# Altium PCB UWB_Beacon_PCB.PcbDoc (part 1 of 2)
Units mm, origin at the board's own origin, x right, y up, seen from the top; angles counter-clockwise.
Board outline 99.75 x 83 mm, 2 copper layers (Top Layer, Bottom Layer); 63 components, 47 nets, 256 pads, 109 vias.
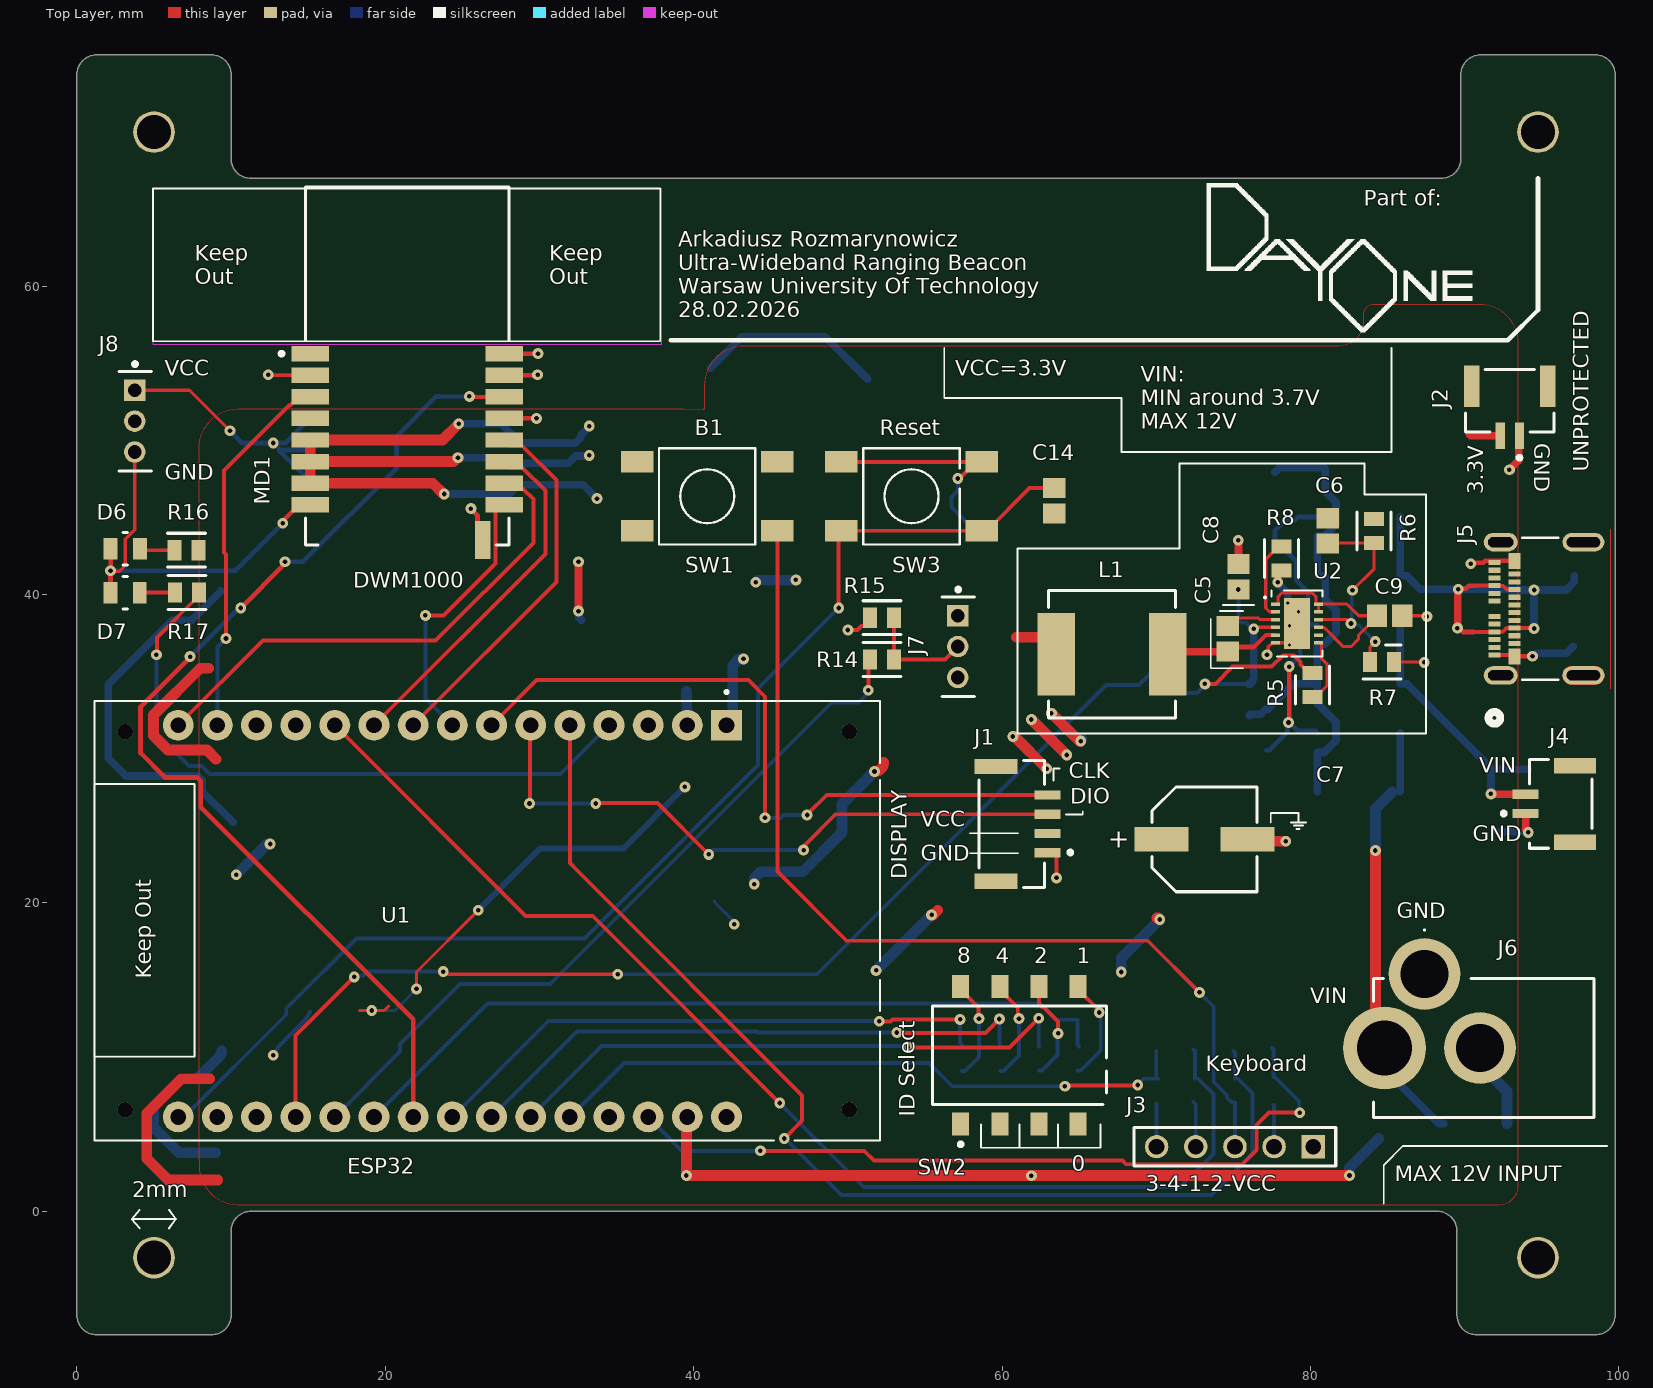
[diagram p0: Top Layer view]
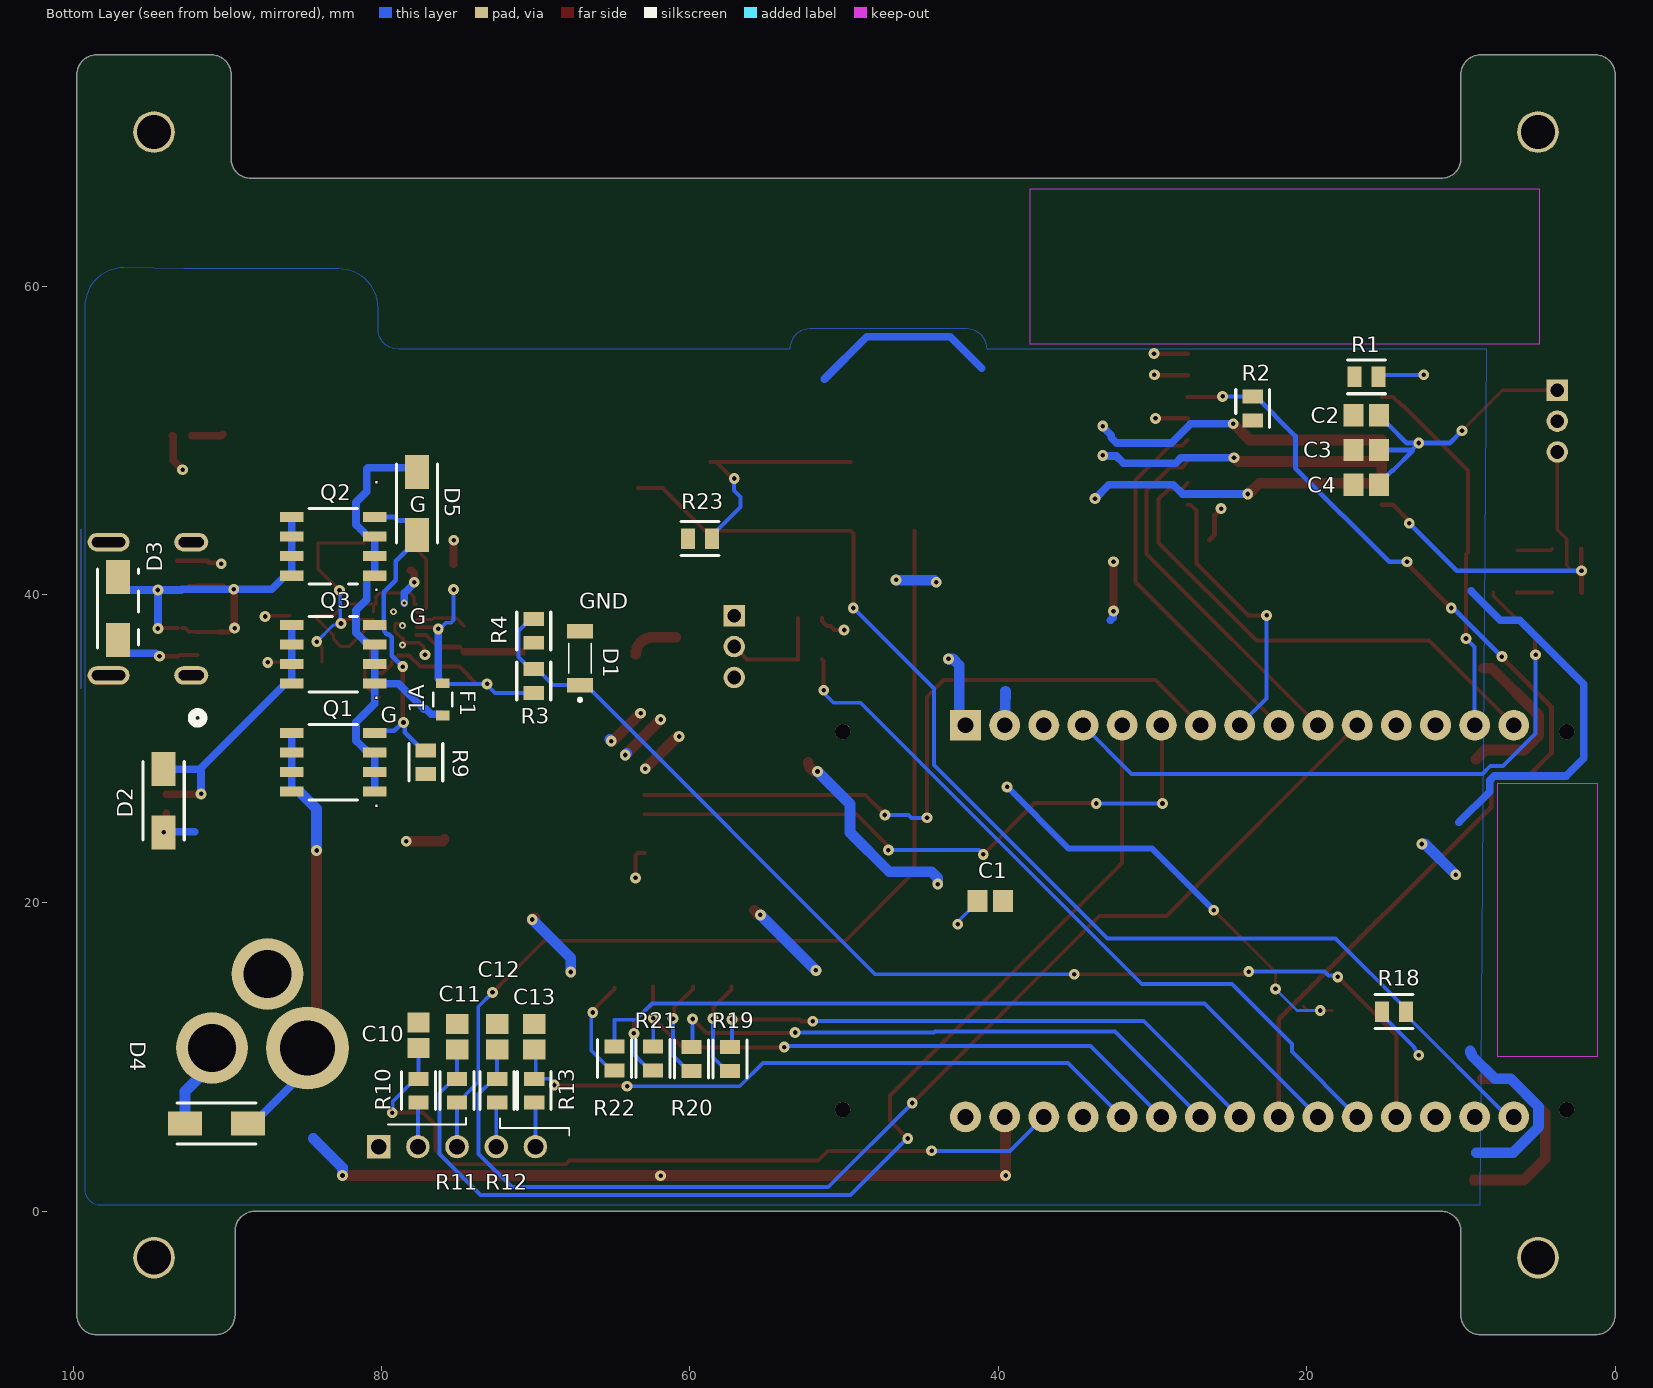
[diagram p1: Bottom Layer view, seen from below]
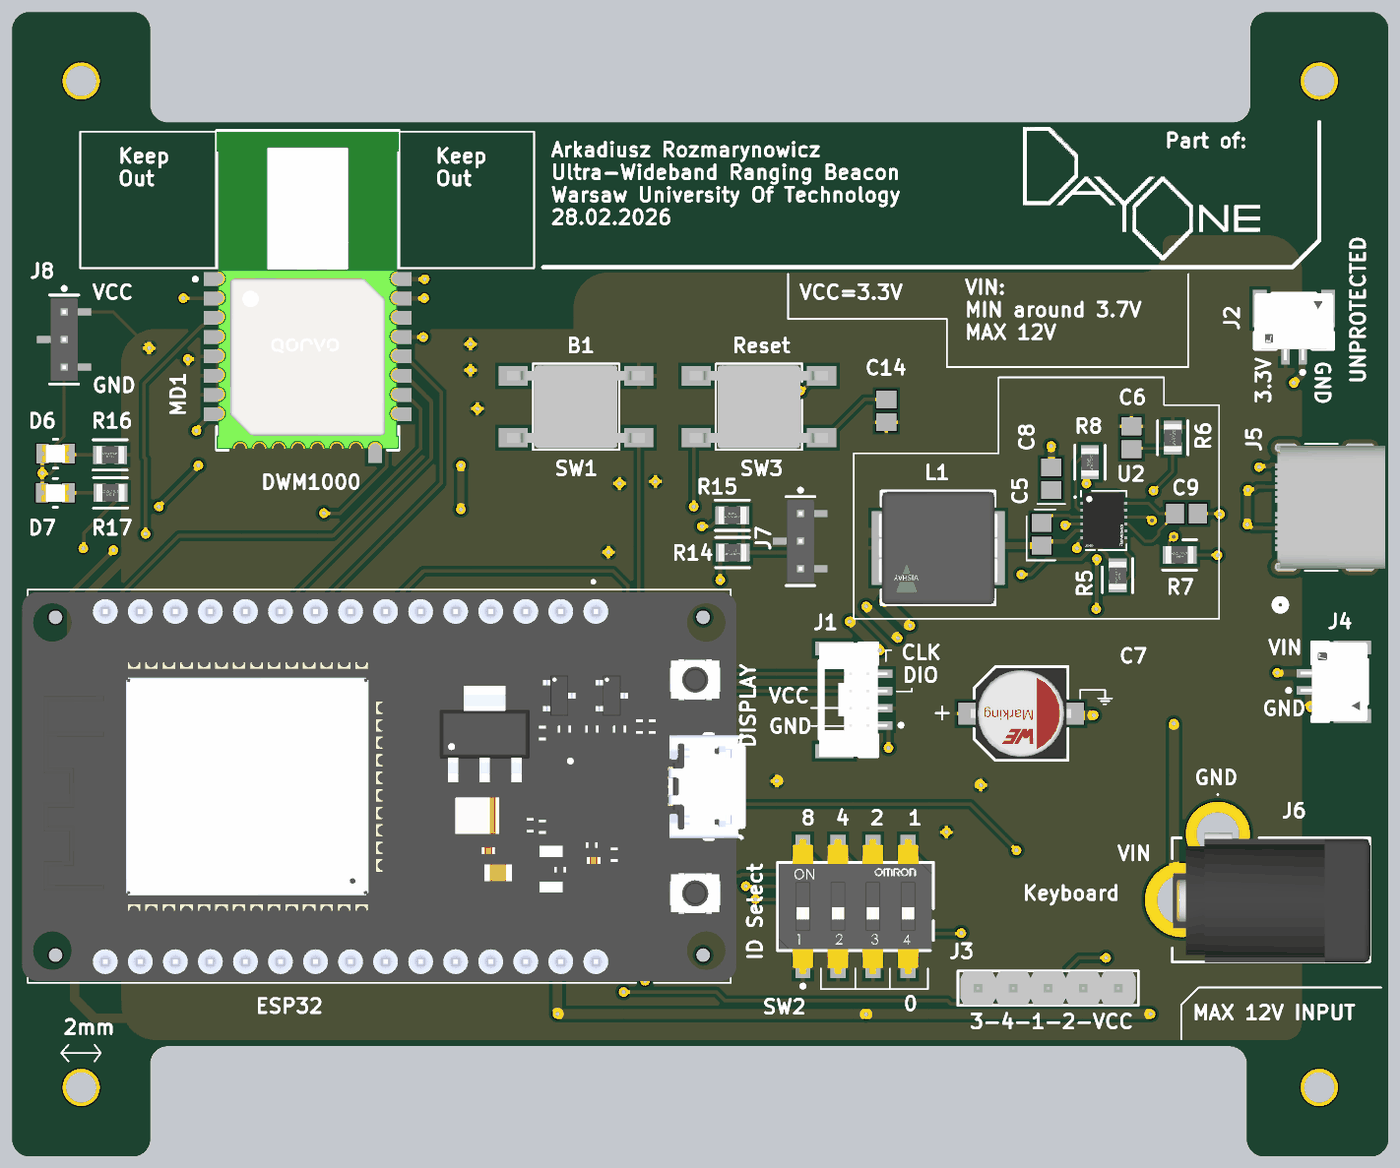
[diagram p2: 3D render of the assembled board from above, using the file's embedded part models]
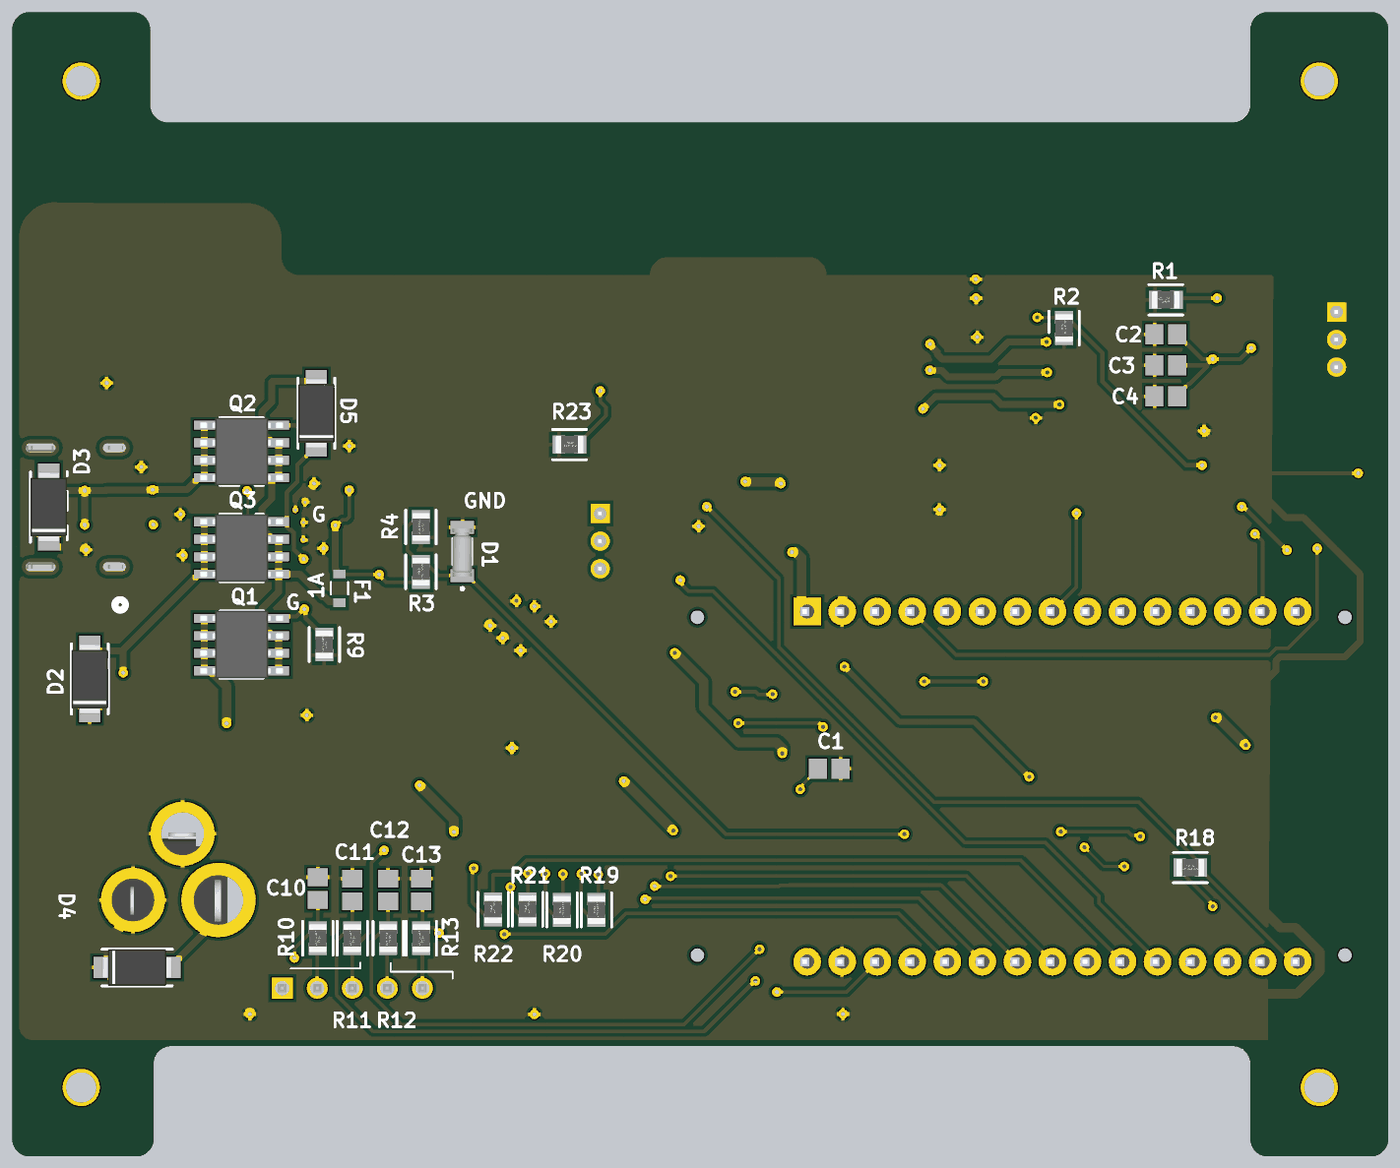
[diagram p3: 3D render of the assembled board from below, using the file's embedded part models]

## Layer stack, top to bottom
Top Solder: solder mask 0.0102, Solder Resist, Dk 3.5
Top Layer: signal copper 0.0356
Dielectric 1: dielectric 0.32, FR-4, Dk 4.8
Bottom Layer: signal copper 0.0356
Bottom Solder: solder mask 0.0102, Solder Resist, Dk 3.5

## Board outline
1.27,-8 8.73,-8 ccw(c8.73,-6.73) 10,-6.73 10,-1.27 cw(c11.27,-1.27) 11.27,0 88.23,0 cw(c88.23,-1.27) 89.5,-1.27 89.5,-6.73 ccw(c90.77,-6.73) 90.77,-8 98.485,-8 ccw(c98.485,-6.73) 99.755,-6.73 99.755,73.73 ccw(c98.485,73.73) 98.485,75 91.025,75 ccw(c91.025,73.73) 89.755,73.73 89.755,68.27 cw(c88.485,68.27) 88.485,67 11.27,67 cw(c11.27,68.27) 10,68.27 10,73.73 ccw(c8.73,73.73) 8.73,75 1.27,75 ccw(c1.27,73.73) 0,73.73 0,-6.73 ccw(c1.27,-6.73)

## Design rules (kind name [scope] priority, off if disabled: settings)
Clearance USB_Port_Pad_Clearance [(InPadClass('All Pads') AND InComponent('J5')) vs InNet('No Net')] p1: gap=0.254 ignorepadtopadclearanceinfootprint=FALSE except(0.14: Arc-Arc Arc-Track Arc-SMDPad Track-Track Track-SMDPad)
Clearance [All] p2: gap=0.254 ignorepadtopadclearanceinfootprint=TRUE except(0.1: SMDPad-Fill; 0.2: Arc-SMDPad Track-SMDPad SMDPad-SMDPad SMDPad-Text)
HoleSize [All] p1: absolutevalues=TRUE maxlimit=3.6 minlimit=0.025 maxpercent=80.000 minpercent=20.000
MinimumSolderMaskSliver [All] p1: minsoldermaskwidth=0.14
PolygonConnect [All] p1: connectstyle=Relief reliefconductorwidth=0.254 reliefentries=4 polygonreliefangle="90 Angle" airgapwidth=0.254
RoutingVias [All] p1: holewidth=0.3 width=0.7 viastyle="Through Hole" minholewidth=0.2 minwidth=0.45 maxholewidth=0.3 maxwidth=0.7
SilkToSolderMaskClearance [IsPad] p1: minsilkscreentomaskgap=0.2 clearancetoexposedcopper=TRUE
SolderMaskExpansion [All] p1: expansion=0.102 istentingtop=FALSE
SupplyNets "Schematic Supply Nets_1" [InNet('VCC')] p1: voltage=0.000
SupplyNets "Schematic Supply Nets" [InNet('GND')] p2: voltage=0.000
Width [All] p1: maxlimit=0.7 minlimit=0.2 preferedwidth=0.254 minimp=50.000000 maximp=50.000000 favimp=50.000000
27 further rules are at their usual default settings.

## Classes and differential pairs
component class Connectors: J1 J2 J3 J4 J5 J6
component class Microcontrollers: C1 C2 C3 C4 MD1 R1 R2 U1
component class Power: C5 C6 C7 C8 C9 D1 D2 D3 D4 D5 F1 L1 Q1 Q2 Q3 R3 R4 R5 R6 R7 R8 R9 U2
component class Interface: C10 C11 C12 C13 C14 D6 D7 J7 J8 R10 R11 R12 R13 R14 R15 R16 R17 R18 R19 R20 R21 R22 R23 REset SW1 SW2 SW3

## Components (designator, comment, footprint, x,y, rotation, side; value= is the part's Value field where it differs from the comment)
C1 "100nF ESP" CAPC2013X145X48NL20T23 40.527,20.127 r0 bottom
C2 "100nF DWM" CAPC2013X145X48NL20T23 16.127,51.627 r180 bottom
C3 "100nF DWM" CAPC2013X145X48NL20T23 16.127,49.377 r180 bottom
C4 "100nF DWM" CAPC2013X145X48NL20T23 16.127,47.127 r180 bottom
C5 "100nF" CAPC2013X145X48NL20T23 74.627,37.127 r90 top
C6 "27pF" CAPC2013X145X48NL20T23 81.127,44.127 r90 top
C7 "100uF" WCAP-ASLI_D6.3H7.7 73.127,24.127 r180 top
C8 "4.7uF" CAPC2013X145X48NL20T23 75.327,41.152 r270 top
C9 "1uF" CAPC2013X145X48NL20T23 85.127,38.627 r180 top
C10 "100nF" CAPC2013X145X48NL20T23 77.6,11.425 r270 bottom
C11 "100nF" CAPC2013X145X48NL20T23 75.1,11.325 r270 bottom
C12 "100nF" CAPC2013X145X48NL20T23 72.5,11.325 r270 bottom
C13 "100nF" CAPC2013X145X48NL20T23 70.1,11.325 r270 bottom
C14 "100nF" CAPC2013X145X48NL20T23 63.377,46.077 r270 top
D1 "Zener 3.3V" ZMM33B 67.127,35.877 r90 bottom
D2 "BATTERY_TVS" DIONM5127X250N 94.127,26.627 r90 bottom
D3 "USB_TVS" DIONM5127X250N 97.1,39.1 r90 bottom
D4 "DC12V_TVS" DIONM5127X250N 90.7,5.7 r180 bottom
D5 "SOURCE_GATE_TVS" DIONM5127X250N 77.702,45.902 r90 bottom
D6 "Power_Indicator" LEDC2012X40N 3.138,42.971 r0 top
D7 "Status_LED" LEDC2012X40N 3.127,40.127 r0 top
F1 "1A PPTC" "CHIP_ 0603L_1P8X1_LTF" 76.027,33.209 r270 bottom
J1 "Display_Connector" FP-BM04B-GHS-TBT_LF_SN-MFG 60.627,25.127 r270 top
J2 "Unprotected_Power" FP-SM02B-GHS-TB_LF_SN-MFG 92.925,52.575 r180 top
J3 "Goldpin male header" SMTC-MTLW-105-05-X-S-190 80.18,4.2 r180 top
J4 "Battery_Connector" FP-SM02B-GHS-TB_LF_SN-MFG 96.227,26.427 r90 top
J5 "USB C" CONN_1054500101_MOL 95.739,39.08 r90 top
J6 "DC_Connector" PCGK21 87.4,15.4 r180 top
J7 "Mode Select" FP-TMM-103-03-T-S-MFG 57.147,36.627 r270 top
J8 "External Voltage Measurement" FP-TMM-103-03-T-S-MFG 3.77,51.25 r270 top
L1 "22uH 8282" FP-IHLP-3232DZ-FP_2_413x5-MFG 67.127,36.127 r180 top
MD1 "DWM1000" FP-DWM1000-MFG 21.422,54.827 r0 top
Q1 "DC12V_Protection" SOIC127P600X170-8N 83.127,29.127 r0 bottom
Q2 "USB_Protection" SOIC127P600X170-8N 83.127,43.127 r0 bottom
Q3 "Battery_Protection" SOIC127P600X170-8N 83.127,36.127 r0 bottom
R1 "10k" FP-CRGCQ0805-IPC_C 16.127,54.127 r0 bottom
R2 "10k" FP-CRGCQ0805-IPC_C 23.502,52.076 r90 bottom
R3 "270k" FP-CRGCQ0805-IPC_C 70.127,34.403 r90 bottom value=100ohm
R4 "100k" FP-CRGCQ0805-IPC_C 70.127,37.653 r270 bottom value=100ohm
R5 "100k" FP-CRGCQ0805-IPC_C 80.127,34.127 r270 top value=100KΩ
R6 "100k" FP-CRGCQ0805-IPC_C 84.127,44.127 r90 top value=100KΩ
R7 "22.1k" FP-CRGCQ0805-IPC_C 84.627,35.627 r180 top
R8 "100k" FP-CRGCQ0805-IPC_C 78.127,42.351 r90 top value=100KΩ
R9 "120ohm" FP-CRGCQ0805-IPC_C 77.127,29.127 r270 bottom value=100ohm
R10 "220ohm" FP-CRGCQ0805-IPC_C 77.6,7.824 r270 bottom
R11 "220ohm" FP-CRGCQ0805-IPC_C 75.1,7.824 r270 bottom
R12 "220ohm" FP-CRGCQ0805-IPC_C 72.5,7.824 r270 bottom
R13 "220ohm" FP-CRGCQ0805-IPC_C 70.1,7.824 r270 bottom
R14 "220ohm" FP-CRGCQ0805-IPC_C 52.224,35.8 r0 top
R15 "10k" FP-CRGCQ0805-IPC_C 52.2,38.5 r0 top
R16 "120ohm" FP-CRGCQ0805-IPC_C 7.101,42.877 r180 top value=120
R17 "120ohm" FP-CRGCQ0805-IPC_C 7.127,40.127 r180 top value=120
R18 "10k" FP-CRGCQ0805-IPC_C 14.351,12.952 r180 bottom
R19 "220ohm" FP-CRGCQ0805-IPC_C 57.4,9.876 r90 bottom
R20 "220ohm" FP-CRGCQ0805-IPC_C 59.9,9.876 r90 bottom
R21 "220ohm" FP-CRGCQ0805-IPC_C 62.4,9.924 r90 bottom
R22 "220ohm" FP-CRGCQ0805-IPC_C 64.9,9.924 r90 bottom
R23 "220ohm" FP-CRGCQ0805-IPC_C 59.351,43.627 r180 bottom
SW1 "Keyboard_B1_Switch" SW4_FSM-5P23_TEC 40.877,46.377 r180 top
SW2 "Beacon_ID_Switch" FP-A6S-4104-H-MFG 61.127,10.127 r90 top
SW3 "RESET" SW4_FSM-5P23_TEC 54.127,46.377 r180 top
U1 "ESP32-DEVKIT-V1" MODULE_ESP32_DEVKIT_V1 26.612,18.827 r270 top
U2 "ISL85410FRZ-T" L12_4x3_MFG 79.127,38.127 r0 top

## Footprints (in the part's own frame and the unit in brackets; to place one, negate y for a bottom-side part, rotate by r counter-clockwise, add the part's x,y. Pads: shape width x height; smd on the part's side, far side on the other; paste and mask are expansions set on the pad)
CAPC2013X145X48NL20T23 [mm] "Chip Capacitor, 2-Leads, Body 2.00x1.25mm, IPC Medium Density"
  rect 1.3x1.45 smd: 1(-0.825,0) 2(0.825,0)
  body extent -1.1,-0.72 1.1,0.72, height 1.45
"CHIP_ 0603L_1P8X1_LTF" [mm]
  rect 0.631x0.898 smd paste+0 mask+0: 1(-1.043,0) 2(1.043,0)
  silkscreen extent -0.44,-0.62 0.44,0.62
CONN_1054500101_MOL [mil]
  rect 13x30 smd paste+0 mask+0: A1(-118.11,149.96) A2(-98.43,149.96) A3(-78.74,149.96) A4(-59.06,149.96) A5(-39.37,149.96) A6(-19.68,149.96) A7(19.68,149.96) A8(39.37,149.96) A9(59.06,149.96) A10(78.74,149.96) A11(98.43,149.96) A12(118.11,149.96) B2(88.58,98.78) B3(68.9,98.78) B4(49.21,98.78) B5(29.53,98.78) B6(9.84,98.78) B7(-9.84,98.78) B8(-29.53,98.78) B9(-49.21,98.78) B10(-68.9,98.78) B11(-88.58,98.78)
  rect 41x30 smd paste+0 mask+0: B1(122.05,98.78) B12(-122.05,98.78)
  oval 47x87 hole 26 slot 65 at 90 deg paste-99999 mask-43.5: S1(-170.08,133.81) S4(170.08,133.81)
  oval 47x107 hole 26 slot 85 at 90 deg paste-99999 mask-53.5: S2(-170.08,-77.21) S3(170.08,-77.21)
  Top Layer region: -193.13,-42.62 -193.58,-47.21 -193.58,-107.21 -193.13,-111.79 -191.79,-116.2 -189.62,-120.26 -186.7,-123.83 -183.13,-126.75 -179.07,-128.92 -174.66,-130.26 -170.08,-130.71 -165.49,-130.26 -161.09,-128.92 -157.02,-126.75 -153.46,-123.83 -150.54,-120.26 -148.37,-116.2 -147.03,-111.79 -146.58,-107.21 -146.58,-47.21 -147.03,-42.62 -148.37,-38.22 -150.54,-34.15 -153.46,-30.59 -157.02,-27.67 -161.09,-25.5 -165.49,-24.16 -170.08,-23.71 -174.66,-24.16 -179.07,-25.5 -183.13,-27.67 -186.7,-30.59 -189.62,-34.15 -191.79,-38.22
  Multi-Layer lines w1: -203.58,-146.67 203.58,-146.67
  silkscreen extent -294,-13 181,165, body extent -176,-150 176,161, height 126
DIONM5127X250N [mm]
  rect 2.2x1.55 smd: 1(-2.05,0) 2(2.05,0)
  silkscreen extent -2.55,-1.33 2.55,1.33, body extent -2.55,-1.33 2.55,1.33, height 2.25
FP-A6S-4104-H-MFG [mm]
  rect 1.5x1.1 smd paste+0 mask+0: 1(-4.45,3.81) 2(-4.45,1.27) 3(-4.45,-1.27) 4(-4.45,-3.81) 5(4.45,-3.81) 6(4.45,-1.27) 7(4.45,1.27) 8(4.45,3.81)
  silkscreen extent -5.9,-5.65 3.2,5.65, body extent -5.3,-5.75 5.3,5.75, height 0.25
FP-BM04B-GHS-TBT_LF_SN-MFG [mm]
  rect 0.6x1.7 smd paste+0 mask+0: 1(1.875,2.325) 2(0.625,2.325) 3(-0.625,2.325) 4(-1.875,2.325)
  rect 1x2.8 smd paste+0 mask+0: 5(-3.725,-1.025) 6(3.725,-1.025)
  silkscreen extent -4.13,-2.12 4.13,3.93, body extent -4.33,-2.52 4.33,3.27, height 0.25
FP-CRGCQ0805-IPC_C [mm]
  rect 0.906x1.31 smd paste+0 mask+0: 1(-0.776,0) 2(0.776,0)
  silkscreen extent -1.23,-1.1 1.23,1.1, body extent -1,-0.63 1,0.63, height 0.65
FP-DWM1000-MFG [mm]
  rect 2.45x1 smd paste+0 mask+0: 1(-6.295,0.8) 2(-6.295,-0.6) 3(-6.295,-2) 4(-6.295,-3.4) 5(-6.295,-4.8) 6(-6.295,-6.2) 7(-6.295,-7.6) 8(-6.295,-9) 17(6.295,-9) 18(6.295,-7.6) 19(6.295,-6.2) 20(6.295,-4.8) 21(6.295,-3.4) 22(6.295,-2) 23(6.295,-0.6) 24(6.295,0.8)
  rect 1x2.45 smd paste+0 mask+0: 16(4.9,-11.295)
  Keep-Out Layer region: -16.5,1.42 16.5,1.42 16.5,11.495 -16.5,11.495
  Keep-Out Layer region: -16.5,1.42 16.5,1.42 16.5,11.495 -16.5,11.495
  silkscreen extent -8.27,-11.6 6.6,11.6, body extent -7.62,-12.62 7.62,11.7, height 0.25
FP-IHLP-3232DZ-FP_2_413x5-MFG [mil]
  rect 95x210 smd paste+0 mask+0: 1(-142.5,0) 2(142.5,0)
  silkscreen extent -163,-163 163,163, body extent -194,-166 194,166, height 10
FP-SM02B-GHS-TB_LF_SN-MFG [mm]
  rect 0.6x1.7 smd paste+0 mask+0: 1(-0.625,2.275) 2(0.625,2.275)
  rect 1x2.7 smd paste+0 mask+0: 3(-2.475,-0.925) 4(2.475,-0.925)
  silkscreen extent -2.88,-2.02 2.88,3.82, body extent -3.08,-2.37 3.08,3.22, height 0.25
FP-TMM-103-03-T-S-MFG [mm]
  rect 1.39x1.39 hole 0.89 paste-2539.97 mask+0: 1(-2,-0.02)
  round 1.39 hole 0.89 paste-2539.97 mask+0: 2(0,-0.02) 3(2,-0.02)
  silkscreen extent -3.82,-1.05 3.22,1.05, body extent -3.1,-2.07 3.1,2.07, height 0.25
L12_4x3_MFG [mm] "Recommended Land Pattern"
  rect 0.6x0.23 smd paste+0 mask+0: 1(-1.4,1.25) 2(-1.4,0.75) 3(-1.4,0.25) 4(-1.4,-0.25) 5(-1.4,-0.75) 6(-1.4,-1.25) 7(1.4,-1.25) 8(1.4,-0.75) 9(1.4,-0.25) 10(1.4,0.25) 11(1.4,0.75) 12(1.4,1.25)
  rect 1.7x3.3 smd paste+0 mask+0: 13(0,0)
  silkscreen extent -2.14,-2.15 1.65,2.15, body extent -1.5,-2 1.5,2, height 1
LEDC2012X40N [mm]
  rect 0.9x1.4 smd: 1(-0.95,0) 2(0.95,0)
  silkscreen extent -0.15,-1.05 0.15,1.05, body extent -1,-0.65 1,0.65, height 0.8
MODULE_ESP32_DEVKIT_V1 [mm]
  rect 2x2 / inner round 2 / far side rect 2x2 hole 1.02: 1(-12.7,15.515)
  round 2 hole 1.02: 2(-12.7,12.975) 3(-12.7,10.435) 4(-12.7,7.895) 5(-12.7,5.355) 6(-12.7,2.815) 7(-12.7,0.275) 8(-12.7,-2.265) 9(-12.7,-4.805) 10(-12.7,-7.345) 11(-12.7,-9.885) 12(-12.7,-12.425) 13(-12.7,-14.965) 14(-12.7,-17.505) 15(-12.7,-20.045) 16(12.7,-20.045) 17(12.7,-17.505) 18(12.7,-14.965) 19(12.7,-12.425) 20(12.7,-9.885) 21(12.7,-7.345) 22(12.7,-4.805) 23(12.7,-2.265) 24(12.7,0.275) 25(12.7,2.815) 26(12.7,5.355) 27(12.7,7.895) 28(12.7,10.435) 29(12.7,12.975) 30(12.7,15.515)
  round 1 hole 1 unplated: ""(-12.28,23.475) ""(-12.28,-23.475) ""(12.23,23.475) ""(12.23,-23.475)
  Keep-Out Layer region: 8.78,-25.475 -8.91,-25.475 -8.91,-18.985 8.78,-18.985
  Keep-Out Layer region: 8.78,-25.475 -8.91,-25.475 -8.91,-18.985 8.78,-18.985
  silkscreen extent -14.95,-25.48 14.23,25.48, body extent -14.1,-25.9 14.1,26.55, height 7.05
PCGK21 [mm]
  round 4.65 hole 3.1: 2(0,0) 3(-3.6,4.8)
  round 5.385 hole 3.59: 4(2.6,4.8)
  silkscreen extent -11,-2.9 3.3,9.3, body extent -11.05,-0.07 3.25,9.35, height 11.1
SMTC-MTLW-105-05-X-S-190 [mm] "Terminal Assembly, 1x5 Pins, Vertical, 2.54mm Pitch, Male"
  rect 1.52x1.52 hole 1.02: 1(0,0)
  round 1.52 hole 1.02: 2(2.54,0) 3(5.08,0) 4(7.62,0) 5(10.16,0)
  silkscreen extent -1.46,-1.24 11.62,1.24, body extent -1.27,-1.24 11.43,1.24, height 6.35
SOIC127P600X170-8N [mm]
  rect 1.525x0.65 smd: 1(-2.688,1.905) 2(-2.688,0.635) 3(-2.688,-0.635) 4(-2.688,-1.905) 5(2.688,-1.905) 6(2.688,-0.635) 7(2.688,0.635) 8(2.688,1.905)
  silkscreen extent -1.57,-2.45 1.57,2.45, body extent -3,-2.45 3,2.45, height 1.7
SW4_FSM-5P23_TEC [mil]
  rect 83x55 smd paste+0 mask+0: 1(-179,88) 2(179,88) 3(-179,-88) 4(179,-88)
  silkscreen extent -123,-123 123,123, body extent -197,-118 197,118, height 199
WCAP-ASLI_D6.3H7.7 [mm] "Aluminium Electrolytic V-Chip SMT Capacitors, 6.3x7.7mm"
  rect 3.5x1.6 smd: 1(2.8,0) 2(-2.8,0)
  silkscreen extent -3.4,-3.4 3.4,3.4, body extent -3.65,-3.3 3.65,3.3, height 7.7
ZMM33B [mm]
  rect 0.95x1.7 smd: 1(-1.75,0) 2(1.75,0)
  silkscreen extent -2.8,-0.72 0.97,0.72, body extent -1.81,-0.72 1.69,0.72, height 1.49

## Part data
C1 C2 C3 C4 C5 C6 C8 C9 C10 C11 C12 C13 C14: library part CMP-2007-01705-1, Manufacturer=Vitramon, Part Number=VJ0805Y104KXAMR
C7: library part CMP-03913-54202496-2, "Cap Aluminum Lytic 100uF 35V 20% (6.3 X 7.7mm) SMD 300mA 2000h 105C T/R", Capacitance=100µF, Case/Package=Radial, ESR (Equivalent Series Resistance)=321.392mΩ, Insulation Resistance=1MΩ, Leakage Current=35µA, Max Operating Temperature=105°C, Min Operating Temperature=-55°C, Ripple Current=300mA, Tolerance=20%, Voltage Rating=35V, Diameter=6.3mm, Dissipation Factor=14%, Height=7.7mm, Impedance=380mΩ, Length=7.7mm, Life (Hours)=2000hours, Packaging="Cut Tape", REACH SVHC=Unknown, Ripple Current (AC)=300mA, RoHS=Compliant, Voltage Rating (DC)=35V, Width=6.6mm
D1: library part ZMM33B, "SMD Planra Zener Diode", Manufacturer_Name=Diotec, Mouser Part Number=637-ZMM33B, Arrow Part Number=ZMM33B, Arrow Price/Stock=https://www.arrow.com/en/products/zmm33b/diotec-semiconductor-ag?utm_currency=USD&region=nac, Geometry.Height=1.45mm, Manufacturer_Part_Number=ZMM33B, Mouser Price/Stock=https://www.mouser.co.uk/ProductDetail/Diotec-Semiconductor/ZMM33B?qs=OlC7AqGiEDlS5hTI7j6ASg%3D%3D
D2 D3 D4 D5: library part SMAJ12CA-HP6AT_13, "19.9V Clamp 30.2A Ipp Tvs Diode Surface Mount DO-214AC (SMA)", Manufacturer_Name=YAGEO, Manufacturer_Part_Number=SMAJ12CA-HP6AT/13, Datasheet Link=https://www.yageo.com/upload/media/product/productsearch/datasheet/cpc/tvs/SMAJ-HP6AT_1.pdf, Geometry.Height=2.5mm
D6 D7: library part LS_R976, "Red 0805 CHIPLED LS R976N-R102 Osram Opto LS R976, CHIPLED 0805 Series Red LED, 633 nm, 2012 (0805), Rectangle Lens SMD Package", Arrow Part Number="LS R976", Manufacturer_Name="ams OSRAM", Mouser Part Number=720-LSR976D5178, Arrow Price/Stock=https://www.arrow.com/en/products/lsr976/osram-opto-semiconductors?region=europe, Datasheet Link=http://uk.rs-online.com/web/p/products/4974804, Geometry.Height=0.4mm, Manufacturer_Part_Number="LS R976", Mouser Price/Stock=https://www.mouser.co.uk/ProductDetail/OSRAM-Opto-Semiconductors/LS-R976?qs=OIr7YF%252B2cWVTfzKl425Fkw%3D%3D
F1: library part 0603L100SLYR, "PPTC", Manufacturer_Name="Littelfuse Inc", Copyright="Copyright (C) 2025 Ultra Librarian. All rights reserved.", Manufacturer_Part_Number=0603L100SLYR, RefDes=RefDes, Type=Type
J1: library part CMP-17439-000062-2, "CONN HEADER SMD 4POS 1.25MM", Case/Package=SMD/SMT, Current Rating=1A, Housing Color=Natural, Max Operating Temperature=85°C, Min Operating Temperature=-25°C, Voltage Rating=50V, Contact Material=Bronze, Contact Plating=Tin, Gender=Male, Housing Material=Nylon, Lead Free="Lead Free", Number of Contacts=4, Number of Positions=4, Number of Rows=4, Orientation=Straight, Packaging="Cut Tape", Pitch=1.25mm, REACH SVHC="No SVHC", Series=GH, Termination=Crimp, Voltage Rating (AC)=50V, Wire/Cable Gauge=26AWG
J2 J4: library part CMP-2000-07076-2, "CONN HEADER SMD R/A 2POS 1.25MM", Color=Natural, Current Rating=1A, Package Quantity=2500, Voltage Rating=50V, Connector Type="Outer Shroud Contact", Contact Material=Bronze, Contact Plating=Tin, Contact Type="Male Pin", Fastening Type=Latch, Housing Color=Natural, Housing Material=Nylon, Lead Free="Lead Free", Mount="Surface Mount", Number of Contacts=2, Number of Positions=2, Number of Rows=1, Orientation="Right Angle", Packaging="Tape and Reel", Pitch=0.049inch, Series=GH, Termination=Solder
J3: library part CMP-1024-00077-1, "Low Profile .025\" SQ Post Header, Through-hole, Vertical, -55 to 105 degC, 2.54 mm Pitch, 5-Pin, Male, RoHS", Manufacturer=Samtec, PartNumber=MTLW-105-05-T-S-190, Temperature Range="-55 to 105 degC", ComponentLink1Description="Manufacturer URL", ComponentLink1URL=http://www.samtec.com, ComponentLink2Description=Datasheet, ComponentLink2URL=http://www.samtec.com/documents/webfiles/pdf/MTLW_TH.PDF, ComponentLink3Description="Package Specification", ComponentLink3URL=http://www.samtec.com/documents/webfiles/cpdf/MTLW-1XX-XX-XX-X-XXX-XX-XX-MKT1.pdf, DatasheetVersion=F-214, Mounting Technology=Through-hole, Orientation=Vertical, PackageDescription="Low Profile Terminal Assembly", PackageReference=MTLW-105-05-X-S-190, PackageVersion="T, 6/1991", Pitch="2.54 mm", RoHS=True
J5: library part 1054500101, "Universal Serial Bus (USB) Shielded I/O Receptacle, Type C, Right-Angle, Top Mount, Surface Mount, 0.80mm Solder Tabs, Gold (Au) Flash over 0.76Âµm Palladium Nickel Plating", Manufacturer_Name=Molex, Copyright="Copyright (C) 2026 Ultra Librarian. All rights reserved.", Manufacturer_Part_Number=1054500101, RefDes=RefDes, Type=Type
J6: library part PC-GK2.1, "Socket; DC supply; male; 5.5/2.1mm; 5.5mm; 2.1mm; THT; angled 90", Manufacturer_Name=Ninigi, Datasheet Link=https://www.tme.eu/Document/78afd4fb8a41e4211137cd818ea9e93d/PC-GK21.jpg, Geometry.Height=11.2mm, Manufacturer_Part_Number=PC-GK2.1
J7 J8: library part CMP-02766-001695-1, "CONN HEADER VERT 3POS 2MM", Color=Black, Max Current Rating=3.9A, Max Operating Temperature=105°C, Max Voltage Rating (AC)=500V, Min Operating Temperature=-55°C, Package Quantity=1, Connector Type=Header, Contact Finish - Mating=TIN, Contact Material=Bronze, Contact Mating Length=0.157inch, Contact Plating=Tin, Contact Shape=Square, Contact Type="Male Pin", Depth=1.97mm, Fastening Type=Pull, Gender=Male, Housing Color=Black, Housing Material=Polymer, Insulation Color=Black, Insulation Material=Polymer, Lead Free="Lead Free", Length=6mm, Mount="Through Hole", Number of Contacts=3, Number of Positions=3, Number of Rows=1, Orientation=Straight, Packaging=Bulk, Pitch=2mm, Radiation Hardening=No, REACH SVHC="No SVHC", RoHS Compliant=Yes, Series=TMM, Termination=Solder
L1: library part CMP-02424-000385-1, "Commercial Inductors, High Temperature (155 °C) Series 22uH 3.7A 110.21mΩ 20%", Case/Package=3232, Current Rating=3.7A, DC Resistance (DCR)=110.21mR, Inductance=22uH, Max DC Current=3.8A, Max Operating Temperature=155°C, Min Operating Temperature=-55°C, Package Quantity=500, Self Resonant Frequency=9MHz, Test Frequency=100kHz, Tolerance=20%, Depth=8.26mm, Height=4mm, Height - Seated (Max)=0.158inch, Lead Free="Lead Free", Length=0.322inch, Military Standard=Not, Mount="Surface Mount", Packaging="Tape and Reel", Saturation Current=3.8A, Shielding=Shielded, Termination=SMD/SMT, Width=0.322inch
MD1: library part CMP-231853-000001-1, "RX TXRX MODULE 802.15.4 CHIP SMD"
Q1 Q2 Q3: library part DMP3056LSS-13, "MOSFET P Channel 30V 7.1A 2.1V @ 250uA 45m @ 6A,10V SOP-8_150mil RoHS", Manufacturer_Name="Diodes Incorporated", Mouser Part Number=621-DMP3056LSS-13, Arrow Part Number=DMP3056LSS-13, Arrow Price/Stock=https://www.arrow.com/en/products/dmp3056lss-13/diodes-incorporated?region=asia, Datasheet Link=https://www.diodes.com//assets/Datasheets/ds31421.pdf, Geometry.Height=1.7mm, Manufacturer_Part_Number=DMP3056LSS-13, Mouser Price/Stock=https://www.mouser.co.uk/ProductDetail/Diodes-Incorporated/DMP3056LSS-13?qs=oUsD4qhOtFyEnPLZKitYRA%3D%3D
R1 R2 R15 R18: library part CMP-03211-009742-1, "CRGCQ0805 10KΩ 0.125W ±100ppm/°C 5% 150V", Ambient Temperature Range High=+70°C, Manufacturer="TE Connectivity", Manufacturer Part Number=CRGCQ0805J100K, Package=CRGCQ0805, Power Rating=0.125W, Temperature="-55°C to +155°C", Temperature Coefficient=±100ppm/°C, Temperature Range High=+155°C, Temperature Range Low=-55°C, Tolerance=0.05, Voltage Rating=150V, Automotive=Yes, Automotive Grade="Grade 1142", Category=Res, ComponentLink2Description=Datasheet, ComponentLink2URL=https://www.te.com/commerce/DocumentDelivery/DDEController?Action=showdoc&DocId=Data+Sheet%7F1773204-3%7F1%7Fpdf%7FEnglish%7FENG_DS_1773204-3_1.pdf%7F4-2176341-1151, Composition="Thick Film", Device Class L1="Passive Components", Device Class L2=Resistors, Device Class L3="Chip SMD Resistors", Height=0.65mm, Ipc Land Pattern Name=RESC200125X55, Lead Free=Yes, Octopart=https://octopart.com/crgcq0805j100k-te+connectivity-91018199, Resistance=10k, RoHS=TRUE, Series=CRGCQ
R3 R4 R9: library part CMP-03211-009742-1, "CRGCQ0805 10KΩ 0.125W ±100ppm/°C 5% 150V", Ambient Temperature Range High=+70°C, Manufacturer="TE Connectivity", Manufacturer Part Number=CRGCQ0805J100K, Package=CRGCQ0805, Power Rating=0.125W, Resistance=100ohm, Temperature="-55°C to +155°C", Temperature Coefficient=±100ppm/°C, Temperature Range High=+155°C, Temperature Range Low=-55°C, Tolerance=0.05, Voltage Rating=150V, Automotive=Yes, Automotive Grade="Grade 1142", Category=Res, ComponentLink2Description=Datasheet, ComponentLink2URL=https://www.te.com/commerce/DocumentDelivery/DDEController?Action=showdoc&DocId=Data+Sheet%7F1773204-3%7F1%7Fpdf%7FEnglish%7FENG_DS_1773204-3_1.pdf%7F4-2176341-1151, Composition="Thick Film", Device Class L1="Passive Components", Device Class L2=Resistors, Device Class L3="Chip SMD Resistors", Height=0.65mm, Ipc Land Pattern Name=RESC200125X55, Lead Free=Yes, Octopart=https://octopart.com/crgcq0805j100k-te+connectivity-91018199, RoHS=TRUE, Series=CRGCQ
R5 R6 R8: library part CMP-03211-009742-1, "CRGCQ0805 100KΩ 0.125W ±100ppm/°C 5% 150V", Ambient Temperature Range High=+70°C, Manufacturer="TE Connectivity", Manufacturer Part Number=CRGCQ0805J100K, Package=CRGCQ0805, Power Rating=0.125W, Resistance=100KΩ, Temperature="-55°C to +155°C", Temperature Coefficient=±100ppm/°C, Temperature Range High=+155°C, Temperature Range Low=-55°C, Tolerance=0.05, Voltage Rating=150V, Automotive=Yes, Automotive Grade="Grade 1142", Category=Res, ComponentLink2Description=Datasheet, ComponentLink2URL=https://www.te.com/commerce/DocumentDelivery/DDEController?Action=showdoc&DocId=Data+Sheet%7F1773204-3%7F1%7Fpdf%7FEnglish%7FENG_DS_1773204-3_1.pdf%7F4-2176341-1151, Composition="Thick Film", Device Class L1="Passive Components", Device Class L2=Resistors, Device Class L3="Chip SMD Resistors", Height=0.65mm, Ipc Land Pattern Name=RESC200125X55, Lead Free=Yes, Octopart=https://octopart.com/crgcq0805j100k-te+connectivity-91018199, RoHS=TRUE, Series=CRGCQ
R7: library part CMP-03211-009742-1, "CRGCQ0805 100KΩ 0.125W ±100ppm/°C 5% 150V", Ambient Temperature Range High=+70°C, Manufacturer="TE Connectivity", Manufacturer Part Number=CRGCQ0805J100K, Package=CRGCQ0805, Power Rating=0.125W, Temperature="-55°C to +155°C", Temperature Coefficient=±100ppm/°C, Temperature Range High=+155°C, Temperature Range Low=-55°C, Tolerance=0.05, Voltage Rating=150V, Automotive=Yes, Automotive Grade="Grade 1142", Category=Res, ComponentLink2Description=Datasheet, ComponentLink2URL=https://www.te.com/commerce/DocumentDelivery/DDEController?Action=showdoc&DocId=Data+Sheet%7F1773204-3%7F1%7Fpdf%7FEnglish%7FENG_DS_1773204-3_1.pdf%7F4-2176341-1151, Composition="Thick Film", Device Class L1="Passive Components", Device Class L2=Resistors, Device Class L3="Chip SMD Resistors", Height=0.65mm, Ipc Land Pattern Name=RESC200125X55, Lead Free=Yes, Octopart=https://octopart.com/crgcq0805j100k-te+connectivity-91018199, Resistance=22.1k, RoHS=TRUE, Series=CRGCQ
R10 R11 R12 R13 R23: library part CMP-03211-009742-1, "CRGCQ0805 100KΩ 0.125W ±100ppm/°C 5% 150V", Ambient Temperature Range High=+70°C, Manufacturer="TE Connectivity", Manufacturer Part Number=CRGCQ0805J100K, Package=CRGCQ0805, Power Rating=0.125W, Resistance=1k, Temperature="-55°C to +155°C", Temperature Coefficient=±100ppm/°C, Temperature Range High=+155°C, Temperature Range Low=-55°C, Tolerance=0.05, Voltage Rating=150V, Automotive=Yes, Automotive Grade="Grade 1142", Category=Res, ComponentLink2Description=Datasheet, ComponentLink2URL=https://www.te.com/commerce/DocumentDelivery/DDEController?Action=showdoc&DocId=Data+Sheet%7F1773204-3%7F1%7Fpdf%7FEnglish%7FENG_DS_1773204-3_1.pdf%7F4-2176341-1151, Composition="Thick Film", Device Class L1="Passive Components", Device Class L2=Resistors, Device Class L3="Chip SMD Resistors", Height=0.65mm, Ipc Land Pattern Name=RESC200125X55, Lead Free=Yes, Octopart=https://octopart.com/crgcq0805j100k-te+connectivity-91018199, RoHS=TRUE, Series=CRGCQ
R14 R19 R20 R21 R22: library part CMP-03211-009742-1, "CRGCQ0805 10KΩ 0.125W ±100ppm/°C 5% 150V", Ambient Temperature Range High=+70°C, Manufacturer="TE Connectivity", Manufacturer Part Number=CRGCQ0805J100K, Package=CRGCQ0805, Power Rating=0.125W, Resistance=10k, Temperature="-55°C to +155°C", Temperature Coefficient=±100ppm/°C, Temperature Range High=+155°C, Temperature Range Low=-55°C, Tolerance=0.05, Voltage Rating=150V, Automotive=Yes, Automotive Grade="Grade 1142", Category=Res, ComponentLink2Description=Datasheet, ComponentLink2URL=https://www.te.com/commerce/DocumentDelivery/DDEController?Action=showdoc&DocId=Data+Sheet%7F1773204-3%7F1%7Fpdf%7FEnglish%7FENG_DS_1773204-3_1.pdf%7F4-2176341-1151, Composition="Thick Film", Device Class L1="Passive Components", Device Class L2=Resistors, Device Class L3="Chip SMD Resistors", Height=0.65mm, Ipc Land Pattern Name=RESC200125X55, Lead Free=Yes, Octopart=https://octopart.com/crgcq0805j100k-te+connectivity-91018199, RoHS=TRUE, Series=CRGCQ
R16 R17: library part CMP-03211-009742-1, "CRGCQ0805 100KΩ 0.125W ±100ppm/°C 5% 150V", Ambient Temperature Range High=+70°C, Manufacturer="TE Connectivity", Manufacturer Part Number=CRGCQ0805J100K, Package=CRGCQ0805, Power Rating=0.125W, Resistance=120, Temperature="-55°C to +155°C", Temperature Coefficient=±100ppm/°C, Temperature Range High=+155°C, Temperature Range Low=-55°C, Tolerance=0.05, Voltage Rating=150V, Automotive=Yes, Automotive Grade="Grade 1142", Category=Res, ComponentLink2Description=Datasheet, ComponentLink2URL=https://www.te.com/commerce/DocumentDelivery/DDEController?Action=showdoc&DocId=Data+Sheet%7F1773204-3%7F1%7Fpdf%7FEnglish%7FENG_DS_1773204-3_1.pdf%7F4-2176341-1151, Composition="Thick Film", Device Class L1="Passive Components", Device Class L2=Resistors, Device Class L3="Chip SMD Resistors", Height=0.65mm, Ipc Land Pattern Name=RESC200125X55, Lead Free=Yes, Octopart=https://octopart.com/crgcq0805j100k-te+connectivity-91018199, RoHS=TRUE, Series=CRGCQ
SW1 SW3: library part 1571563-4, "FSM4JSMAATR=TACTSWITCH,SMT,T&R", Manufacturer_Name="TE Connectivity", Copyright="Copyright (C) 2025 Ultra Librarian. All rights reserved.", Manufacturer_Part_Number=1571563-4, RefDes=RefDes, Type=Type
SW2: library part CMP-08827-000006-1, "SWITCH SLIDE DIP SPST 25MA 24V", Ambient Temperature Range High=+70°C, Ambient Temperature Range Low=-20°C, Contact Current Rating=25mA, Contact Resistance=200mΩ, Manufacturer="Omron Electronics Inc-EMC Div", Manufacturer Part Number=A6S-4104-H, Package=0, Temperature="-20°C to +70°C", Voltage Rating Dc=24V, Automotive=No, Category=Switch, ComponentLink2Description=Datasheet, ComponentLink2URL=https://omronfs.omron.com/en_US/ecb/products/pdf/en-a6s.pdf, Device Class L1=Electromechanical, Device Class L2=Switches, Device Class L3="DIP Switches", Digikey Description="SWITCH SLIDE DIP SPST 25MA 24V", Electromechanical Life=1000Cycles, Height=4.5mm, Lead Free=Yes, Mount="Surface Mount", Mouser Description="DIP Switches / SIP Switches Dip Switch", Number Of Circuits=4, Octopart=https://octopart.com/a6s-4104-h-omron-1480027, RoHS=TRUE, Standoff Height=0.7mm, Temperature Range High=+70°C, Temperature Range Low=-20°C, Throw Configuration=SPST
U1: "Dual core, Wi-Fi: 2.4 GHz up to 150 Mbits/s,BLE (Bluetooth Low Energy) and legacy Bluetooth, 32 bits, Up to 240 MHz", Package=None, Check_prices=https://www.snapeda.com/parts/ESP32-DEVKIT-V1/Do+it/view-part/?ref=eda, MF="Do it", MP=ESP32-DEVKIT-V1, SnapEDA_Link=https://www.snapeda.com/parts/ESP32-DEVKIT-V1/Do+it/view-part/?ref=snap
U2: library part CMP-00572-88255842-3, "Inverter RoHS Compliant Adjustable Positive Switching Regulator IC 125C 2MHz 1A 82.298666mg", Case/Package=DFN, Manufacturer Lifecycle Status=ACTIVE, Max Input Voltage=40V, Max Junction Temperature (Tj)=125°C, Max Output Current=1A, Max Output Voltage=34V, Min Input Voltage=3V, Min Operating Temperature=-40°C, Min Output Voltage=600mV, Operating Supply Current=4µA, Operating Supply Voltage=36V, Quiescent Current=80µA, Switching Frequency=2MHz, ComponentLink1Description="Manufacturer's Website", ComponentLink1URL=http://www.renesas.com, ComponentLink2Description="Datasheet URL", ComponentLink2URL=https://octopart.com/cad-content/api/get-model-datasheet/15189/88255842, ComponentLink3Description="Manufacturer's Package Drawing", ComponentLink3URL=https://www.renesas.com/en/document/psc/l124x3-12-lead-dual-flat-no-lead-plastic-package?r=568491, Efficiency=94%, Export Control Classification Number (ECCN) Code=EAR99, Height=900µm, HelpURL=https://octopart.com/cad-content/api/get-model-datasheet/15189/88255842, Lead Free="Lead Free", Length=4mm, Lifecycle Status=Production, Logic Function=Inverter, Max Operating Temperature=125°C, Max Supply Voltage=40V, Min Supply Voltage=3V, Mount="Surface Mount", Number of Outputs=1, Number of Pins=12, Output Configuration=Positive, Output Current=1A, Output Type=Adjustable, Output Voltage=34V, Packaging="Tape & Reel", Pitch=500µm, Radiation Hardening=No, RAM Size=12kB, RoHS=Compliant, Sync/Async=Synchronous, Synchronous Rectifier=Yes, Topology=Buck, Weight=82.298666mg, Width=3mm

## Free pads (board coordinates)
  round 2.7 hole 2.2: 2(5,-3) 2(5,70) 2(94.755,-3) 2(94.755,69.999)

## Via types
v1: diameter 0.7, hole 0.3, Top Layer to Bottom Layer, 105 vias
v2: diameter 0.45, hole 0.2, Top Layer to Bottom Layer, 4 vias

## Nets (pads, with @x,y where several pads share a name; then routed paths per layer and width w, separated by ;. In a path a pad name is that pad's centre, name@x,y a point inside that pad or via, vN(x,y) a via of type N, cw(c..) or ccw(c..) an arc to the next point about the centre after c; other vN are vias at no path point)
Battery_Vin: D2.2 J4.2 Q3.5 Q3.6 Q3.7 Q3.8 | length 18.3
  Top Layer w0.5: v1(91.702,27.077) 91.727,27.052 J4.2
  Bottom Layer w0.5: Q3.5 Q3.6 Q3.7 Q3.8 86.253,34.222 91.798,28.677 ; v1(91.702,27.077) 91.702,28.582 91.798,28.677 ; D2.2 91.798,28.677
Beacon_ID_0: R22.2 U1.21 | length 50.9
  Bottom Layer w0.254: U1.21 26.617,13.477 62.461,13.477 63.511,12.427 64.902,12.427 64.902,10.798 R22.2@65,10.7
Beacon_ID_1: R21.2 U1.25 | length 37.5
  Top Layer w0.254: v1(53.877,10.652) 53.902,10.627 60.477,10.627 v1@62.397,12.547
  Bottom Layer w0.254: U1.25 34.027,10.727 53.802,10.727 v1(53.877,10.652) ; v1(62.377,12.527) 62.377,10.723 R21.2
Beacon_ID_2: R20.2 U1.24 | length 37.6
  Top Layer w0.254: v1(53.177,11.602) 53.202,11.577 58.927,11.577 v1@59.857,12.507
  Bottom Layer w0.254: U1.24 32.437,11.677 43.494,11.677 43.5,11.671 44.105,11.671 44.18,11.596 53.171,11.596 v1(53.177,11.602) ; v1@59.8,12.5 59.827,12.473 59.827,10.725 R20.2
  other v1: 59.827,12.477
Beacon_ID_3: R19.2 U1.23 | length 37.3
  Top Layer w0.254: v1(52.027,12.327) 52.76,12.327 52.885,12.452 v1(57.277,12.452)
  Bottom Layer w0.254: U1.23 30.567,12.347 52.008,12.347 v1(52.027,12.327) ; v1(57.277,12.452) 57.277,10.923 R19.2@57.4,10.8
DC12V_Vin: D4.2 J6.4 Q1.5 Q1.6 Q1.7 Q1.8 | length 28.7
  Top Layer w0.7: v1(84.208,23.4) 84.225,23.383 84.225,11.175 J6.4
  Bottom Layer w0.5: J6.4@84.3,11.3 85.735,9.865 85.735,8.29 88.325,5.7 D4.2 ; Q1.8 Q1.7 Q1.6 Q1.5
  Bottom Layer w0.7: v1(84.208,23.4) 84.208,26.108 Q1.8@85.3,27.2
Display_CLK: J1.4 U1.7 | length 46.2
  Top Layer w0.254: U1.7 29.812,34.452 43.552,34.452 44.627,33.377 v1(44.627,25.527) ; v1(47.352,25.702) 47.352,25.727 48.627,27.002 J1.4
  Bottom Layer w0.254: v1(44.627,25.527) 44.652,25.502 45.635,25.502 45.835,25.702 v1(47.352,25.702)
Display_DIO: J1.3 U1.6 | length 41.3
  Top Layer w0.254: v1(29.352,26.452) 29.39,26.49 29.39,31.49 U1.6 ; v1(33.652,26.452) 33.677,26.477 37.652,26.477 v1(40.977,23.152) ; v1(47.127,23.427) 47.177,23.477 47.177,23.727 49.202,25.752 J1.3
  Bottom Layer w0.254: v1(29.352,26.452) v1(33.652,26.452) ; v1(40.977,23.152) 41.252,23.427 v1(47.127,23.427)
DWM_IRQ: MD1.22 R2.2 U1.22 | length 68.4
  Top Layer w0.254: v1(25.452,52.852) 25.477,52.827 MD1.22
  Top Layer w0.305: v1(7.341,35.977) 7.341,35.941 4.127,32.727 4.127,29.727 5.711,28.144 7.796,28.144 8.034,27.906 8.034,26.221 21.807,12.447 U1.22 ; v1(10.627,39.127) 13.491,41.991 v1(13.491,42.128)
  Bottom Layer w0.254: R2.2 v1(25.452,52.852)
  Bottom Layer w0.305: v1(7.341,35.977) 10.491,39.127 v1(10.627,39.127) ; v1(13.491,42.128) 14.653,42.128 20.727,48.202 20.727,50.279 23.301,52.852 R2.2
DWM_RST: MD1.3 U1.14 | length 24.4
  Top Layer w0.254: v1(9.673,37.156) 9.673,42.598 9.552,42.719 9.552,48.04 13.767,52.254 13.829,52.254 14.402,52.827 MD1.3
  Bottom Layer w0.254: U1.14 9.107,36.591 v1(9.673,37.156)
DWM_SPI_CLK: MD1.20 U1.9 | length 24.2
  Top Layer w0.254: U1.9 31.102,40.822 31.102,47.43 28.878,49.654 28.09,49.654 MD1.20
DWM_SPI_CS: MD1.17 U1.8 | length 17.9
  Top Layer w0.254: v1(22.602,38.652) 23.777,38.652 27.149,42.024 27.149,45.454 27.522,45.827 MD1.17
  Bottom Layer w0.254: v1(22.602,38.652) 22.602,33.272 U1.8
DWM_SPI_MISO: MD1.19 U1.10 | length 23.3
  Top Layer w0.254: U1.10 30.377,42.637 30.377,46.755 28.878,48.254 28.09,48.254 MD1.19
DWM_SPI_MOSI: MD1.18 U1.15 | length 33.1
  Top Layer w0.254: U1.15 12.057,37.017 23.267,37.017 29.602,43.352 29.602,46.19 28.965,46.827 ; MD1.18 28.09,46.854 28.937,46.854 28.964,46.827
GND: C1.1 C2.1 C3.1 C4.1 C7.2 C8.1 C9.1 C10.1 C11.1 C12.1 C13.1 D1.2 D2.1 D3.1 D4.1 D6.1 D7.1 J1.1 J2.1 J4.1 J5.A1 J5.A12 J5.B1 J5.B12 J6.2 J6.3 J8.3 MD1.8 MD1.16 MD1.21 MD1.23 MD1.24 R1.2 R2.1 R4.2 R7.1 R8.1 R9.2 R15.1 R23.1 U1.2 U1.29 U2.6 U2.13 | length 188.2
  Top Layer w0.2: v1@2.25,41.5 2.75,41.5 3.136,41.886 3.136,43.593 3.75,44.206 J8.3
  Top Layer w0.22: v1(77.181,36.102) 77.273,36.194 77.273,36.608 77.542,36.877 U2.6 ; U2.6@77.732,36.877 78.387,36.877 79.127,37.617 U2.13 ; U2.13@78.602,37.156 78.602,36.765 v2(78.642,36.725) ; v2(78.642,37.982) 78.788,38.127 U2.13 ; U2.13@79.127,37.682 U2.13 ; R7.1 87.352,35.627 v1(87.377,35.602) ; C9.1 87.502,38.627 v1(87.552,38.577)
  Top Layer w0.254: v1(50,37.7) 50.624,37.7 50.896,37.972 51.098,37.972 51.424,38.298 R15.1 ; J1.1 63.354,23.252 63.527,23.079 v1(63.527,21.627) ; J5.A1 93.12,36.08 J5.B12@93.2,36
  Top Layer w0.3: v1(13.352,44.627) 13.429,44.704 13.429,44.854 14.402,45.827 MD1.8 ; v1(90.4,42) 90.467,42.067 91.2,42.067 91.333,42.2 J5.B1@93.25,42.2 ; J5.B12 93.25,36 v1(94.4,36)
  Top Layer w0.305: D7.1 v1(2.177,41.552) ; v1@2.188,41.563 D6.1 ; v1(25.552,45.577) 25.975,45.155 25.975,43.88 MD1.16 ; MD1.21 v1(29.802,51.427) ; MD1.23 29.852,54.227 ccw(c29.852,54.252) v1(29.877,54.252) ; MD1.24 v1(29.902,55.627)
  Top Layer w0.5: v1(32.527,38.927) v1(32.527,42.127) ; v1(75.316,43.53) 75.305,43.53 75.302,43.527 75.327,43.502 C8.1 ; v1(77.877,40.802) 77.877,41.372 78.08,41.575 R8.1 ; v1(92.9,48.1) 93.5,48.7 93.5,50.25 J2.1 ; J4.1 93.952,24.752 v1(94.127,24.577)
  Top Layer w0.7: U1.29 39.527,6.067 v1(39.527,2.327) v1@61.9,2.327 ; v1(60.7,30.8) 60.8,30.8 v1(62.9,28.7) ; v1(61.9,2.306) v1@61.9,2.327 ; v1(61.9,31.9) v1(64.2,29.6) ; v1(63.2,32.3) 65,30.5 v1(65.1,30.5) ; C7.2 76.055,24 v1(78.4,24) ; v1(82.527,2.327) v1@61.9,2.327
  Bottom Layer w0.3: 9.152,41.552 10.277,41.552 v1(13.352,44.627)
  Bottom Layer w0.305: v1(2.177,41.552) 9.152,41.552
  Bottom Layer w0.5: 9.327,40.227 7.442,38.342 6.184,38.342 2.027,34.185 2.027,29.383 3.169,28.241 7.836,28.241 8.131,27.946 8.131,27.223 10.127,25.227 ; v1(32.527,38.927) 32.566,38.889 32.566,38.489 32.727,38.327 ; 41.071,54.671 43.127,56.727 48.527,56.727 51.271,53.984 ; v1(77.877,40.802) 77.877,40.748 78.527,40.099 v2(78.527,39.458) ; 92.127,24.627 94.077,24.627 v1(94.127,24.577) ; v1(94.4,36) 94.454,36 94.654,36.2 96.6,36.2 D3.1@97.027,36.627
  Bottom Layer w0.7: 9,3.8 6.626,3.8 4.963,5.463 4.963,6.792 6.767,8.596 7.796,8.596 9.3,10.1 9.3,10.2 9.4,10.3 9.4,10.4 ; 39.527,33.727 U1.2 ; v1@64.1,29.7 v1(64.2,29.6) ; v1(65.1,30.5) v1@65.2,30.6 ; v1(82.527,2.327) 82.527,2.827 84.427,4.727 ; J6.3@90.9,10.5 90.9,9.631 92.75,7.781 D4.1
  other v2: 79.223,38.889
Input_Voltage_Protected: C8.2 F1.1 R3.1 R5.1 U2.4 | length 22.7
  Top Layer w0.22: v1(76.327,37.777) 76.457,37.777 76.557,37.877 U2.4
  Top Layer w0.254: v1(73.152,34.209) 73.834,34.209 74.95,35.325 77.475,35.325 78.208,36.058 78.93,36.058 79.358,35.63 79.358,35.471 79.926,34.903 R5.1
  Bottom Layer w0.254: R3.1 72.652,33.627 v1@73.177,34.152 ; v1(73.152,34.209) 73.156,34.206 F1.1@75.828,34.206 ; v1(75.327,40.327) 75.327,38.352 75.507,38.173 75.811,38.173 76.207,37.777 v1(76.327,37.777)
  Bottom Layer w0.5: F1.1@75.981,34.206 76.114,34.206 76.227,34.318 76.227,34.452 76.327,34.552 v1(76.327,37.777)
ISL85_VCC: C9.2 U2.1 U2.9 U2.11 U2.12 | length 13.9
  Top Layer w0.2: U2.1 77.888,39.377 77.9,39.389 77.9,39.863 78.142,40.104 80.113,40.104 80.354,39.863 80.354,39.389 80.366,39.377 U2.12 ; U2.9 80.542,37.862 80.892,37.862 82.127,36.627 82.627,36.627 83.127,37.127 83.127,37.377 84.302,38.552 C9.2 83.123,38.627 82.373,39.377 U2.12 ; U2.11 U2.12
Keyboard_B1_Pin: J3.3 R11.2 SW1.1 | length 64
  Top Layer w0.254: SW1.1 45.424,22.031 49.902,17.552 69.448,17.552 v1(72.8,14.2)
  Bottom Layer w0.254: v1@72.8,14.3 v1(72.8,14.2) 73.729,13.271 73.729,8.401 74.572,7.558 74.572,7.374 74.898,7.048 R11.2@75.082,7.048 ; J3.3@75.1,4.1 R11.2
Keyboard_B2_Pin: J3.2 R10.2 | length 2.7
  Bottom Layer w0.254: R10.2@77.6,6.9 77.64,6.86 J3.2
Keyboard_B3_Pin: J3.5 R13.2 | length 2.8
  Bottom Layer w0.254: R13.2@70,7 70.02,6.98 J3.5
Keyboard_B4_Pin: J3.4 R12.2 | length 3
  Bottom Layer w0.254: R12.2@72.4,7.1 72.56,6.94 J3.4
Keyboard_Button_1: C11.2 R11.1 U1.5 | length 73.8
  Top Layer w0.254: U1.5 31.967,22.586 32.526,22.027 ; 32.527,22.027 47.027,7.527 47.027,5.877 v1(45.877,4.727)
  Bottom Layer w0.254: v1(45.877,4.727) 45.902,4.752 49.587,1.067 73.581,1.067 76.241,3.727 76.241,7.661 75.302,8.6 R11.1 75.1,10.3 C11.2@75,10.4
Keyboard_Button_2: C10.2 R10.1 U1.28 | length 50.8
  Top Layer w0.254: v1(44.327,3.927) 51.058,3.927 51.686,3.3 67.8,3.3 68.041,3.059 75.573,3.059 76.499,3.985 76.499,5.599 77.3,6.4 v1(79.3,6.4)
  Bottom Layer w0.254: U1.28 39.247,3.927 v1(44.327,3.927) ; C10.2@77.5,10.6 77.6,10.5 R10.1@77.6,8.7 ; R10.1@77.7,8.7 77.702,8.7 79.271,7.131 79.271,6.429 v1(79.3,6.4)
Keyboard_Button_3: C13.2 R13.1 U1.26 | length 42.4
  Top Layer w0.254: v1(64.075,8.115) 64.118,8.158 68.758,8.158 v1(68.8,8.2)
  Bottom Layer w0.254: U1.26 35.467,9.627 55.255,9.627 56.767,8.115 v1(64.075,8.115) ; v1@68.7,8.2 68.755,8.2 69.155,8.6 R13.1 70,8.7 C13.2@70,10.4
Keyboard_Button_4: C12.2 R12.1 U1.11 | length 77.7
  Top Layer w0.254: U1.11 29.102,19.153 33.452,19.153 v1(45.577,7.027)
  Bottom Layer w0.254: v1(45.577,7.027) 51.029,1.575 71.549,1.575 73.701,3.727 73.701,7.601 72.702,8.6 R12.1 72.5,10.4 C12.2@72.4,10.5
Mode_Select: R14.1 U1.20 | length 48.5
  Top Layer w0.254: v1(51.324,33.8) 51.324,35.7 R14.1@51.424,35.8
  Bottom Layer w0.254: U1.20 20.957,10.357 20.957,10.857 24.852,14.752 30.696,14.752 48.932,32.988 50.688,32.988 51.3,33.6 v1@51.3,33.8
MOSFETs_Source: D5.2 F1.2 Q1.1 Q1.2 Q1.3 Q2.1 Q2.2 Q2.3 Q3.1 Q3.2 Q3.3 | length 33.4
  Bottom Layer w0.5: F1.2 76.093,32.231 76.774,32.231 77.127,32.584 77.261,32.584 78.899,34.222 Q3.1 ; D5.2 77.972,48.222 80.439,48.222 80.877,48.222 80.952,48.147 80.952,46.684 81.652,45.984 81.652,44.521 81.388,44.257 81.372,44.257 80.877,43.762 Q2.3 Q2.2 Q2.1 80.877,41.222 80.952,41.147 80.952,39.684 81.652,38.984 81.652,37.521 81.388,37.257 81.372,37.257 80.877,36.762 Q3.3 Q3.2 Q3.1 ; Q1.1 Q1.2 Q1.3 80.877,29.762 81.372,30.257 81.388,30.257 81.652,30.521 81.652,31.728 80.439,32.94 Q3.1
MOSFETSs_Gate: D5.1 Q1.4 Q2.4 Q3.4 R9.1 | length 22.3
  Top Layer w0.3: v1(78.577,31.702) 78.627,31.752 v1(78.627,35.327)
  Bottom Layer w0.3: R9.1 77.329,29.903 78.501,31.075 78.501,31.626 v1(78.577,31.702) 78.626,31.702 79.168,31.161 80.311,31.161 Q1.4 ; v1(78.627,35.327) 79.327,36.027 79.327,37.232 79.532,37.437 79.651,37.437 79.827,37.613 79.827,37.857 Q3.4@80.002,38.032 ; Q3.4 Q3.4@80.002,38.032 ; Q2.4 79.192,45.032 78.962,44.802 78.327,44.802 77.702,44.177 D5.1 77.702,43.527 79.077,42.153 79.077,40.923 79.852,40.148 79.852,38.183 Q3.4@80.002,38.032
NetC5_1: C5.1 L1.1 U2.5 | length 7.5
  Top Layer w0.2: L1.1 L1.1@70.922,36.302 ; C5.1 C5.1@74.927,36.602
  Top Layer w0.254: 76.327,36.602 77.102,37.377 U2.5
  Top Layer w0.3: C5.1@74.927,36.602 76.327,36.602
  Top Layer w0.5: L1.1@70.922,36.302 C5.1
NetC5_2: C5.2 U2.3 | length 3.4
  Top Layer w0.2: C5.2 75.156,38.481 76.619,38.481 76.723,38.377 U2.3
NetC6_1: C6.1 R6.1 R7.2 U2.10 | length 14.6
  Top Layer w0.2: U2.10 82.377,38.377 v1(82.627,38.127) ; C6.1 81.176,43.351 R6.1 84.127,41.677 v1(82.727,40.277) ; R7.2 83.851,36.582 84.202,36.933 v1(84.202,36.952)
  Bottom Layer w0.2: v1(82.727,40.277) 82.677,40.227 82.677,38.177 v1(82.627,38.127) 82.723,38.032 83.123,38.032 v1(84.202,36.952)
NetD6_2: D6.2 R16.2 | length 2.3
  Top Layer w0.254: D6.2 4.182,42.877 R16.2
NetD7_2: D7.2 R17.2 | length 2.3
  Top Layer w0.254: D7.2 R17.2
NetJ7_2: J7.2 R14.2 R15.2 | length 7.3
  Top Layer w0.254: R14.2@52.976,35.8 56.3,35.8 57.1,36.6 J7.2@57.2,36.6 ; R14.2 R15.2@53,38.5
NetMD1_2: MD1.2 R1.1 | length 5.7
  Top Layer w0.254: v1(12.402,54.252) 12.427,54.227 MD1.2
  Bottom Layer w0.254: v1(12.402,54.252) 15.226,54.252 R1.1
NetR5_2: R5.2 U2.7 | length 4.4
  Top Layer w0.2: R5.2 80.329,33.351 81.082,34.104 81.082,35.481 80.727,35.836 80.727,36.862 80.712,36.877 U2.7
NetR8_2: R8.2 U2.2 | length 5.3
  Top Layer w0.2: U2.2 77.715,38.889 77.338,38.889 77.1,39.127 77.1,42.302 77.926,43.127 R8.2
NetR19_1: R19.1 SW2.8 | length 6.6
  Top Layer w0.254: SW2.8@57.3,14.6 57.3,14.395 58.464,13.231 58.464,12.536 v1(58.5,12.5)
  Bottom Layer w0.254: R19.1 57.602,9.1 58.5,9.998 v1(58.5,12.5)
NetR20_1: R20.1 SW2.7 | length 6.7
  Top Layer w0.254: SW2.7@59.8,14.6 59.8,14.435 61.015,13.22 61.015,12.585 v1(61.1,12.5)
  Bottom Layer w0.254: R20.1 60.102,9.1 61.1,10.098 v1(61.1,12.5)
NetR21_1: R21.1 SW2.6 | length 6.6
  Top Layer w0.254: SW2.6 62.397,13.446 62.585,13.258 62.68,13.258 63.635,12.304 v1(63.635,11.54)
  Bottom Layer w0.254: R21.1 62.602,9.148 63.6,10.146 63.6,11.505 v1(63.635,11.54)
NetR22_1: R22.1 SW2.5 | length 6.7
  Top Layer w0.254: SW2.5@64.9,14.5 64.9,14.415 66.3,13.015 v1(66.3,12.9)
  Bottom Layer w0.254: R22.1 65.102,9.148 66.4,10.446 66.4,12.8 v1(66.3,12.9)
NetR23_2: R23.2 SW3.3 SW3.4 | length 15.6
  Top Layer w0.254: SW3.4 SW3.3@58.318,48.613 ; v1(57.127,47.527) 57.233,47.527 SW3.3@58.318,48.613 ; SW3.3 SW3.3@58.318,48.613
  Bottom Layer w0.254: v1(57.127,47.527) 57.127,46.757 56.713,46.342 56.713,45.692 58.575,43.829 R23.2
Reset_Switch: C14.1 R18.2 SW3.1 SW3.2 U1.16 | length 79.7
  Top Layer w0.254: v1(49.402,39.127) 49.402,43.964 SW3.2 SW3.1 59.03,44.142 61.79,46.902 C14.1
  Bottom Layer w0.254: U1.16 6.952,6.127 13.575,12.751 R18.2 13.575,13.154 18.128,17.707 32.932,17.707 44.177,28.952 44.177,33.902 v1(49.402,39.127)
Status_LED: R17.1 U1.4 | length 42
  Top Layer w0.254: v1(5.152,36.102) 5.186,36.136 5.186,37.208 7.903,39.926 R17.1
  Bottom Layer w0.254: v1(5.152,36.102) 5.152,30.989 7.269,28.872 8.098,28.872 8.593,28.377 31.357,28.377 U1.4
USB_Vin: D3.2 J5.A4 J5.A9 J5.B4 J5.B9 Q2.5 Q2.6 Q2.7 Q2.8 | length 29.4
  Top Layer w0.254: 90.6,37.577 J5.A4@91.93,37.577 ; 90.72,40.58 91.792,40.58 J5.A9@91.8,40.588 ; J5.A4 91.938,37.588 92.479,37.588 92.714,37.822 J5.B9@92.9,37.822 ; J5.A9 91.938,40.572 92.479,40.572 92.729,40.322 J5.B4@92.9,40.322 ; J5.B9 93.238,37.822 94.478,37.822 v1(94.5,37.8)
  Top Layer w0.3: v1(89.527,37.827) 89.636,37.827 89.886,37.577 90.6,37.577 ; v1(89.577,40.352) 89.613,40.388 90.073,40.388 90.265,40.58 90.72,40.58
  Top Layer w0.5: v1(89.527,37.827) 89.552,37.852 89.552,40.327 v1(89.577,40.352)
  Bottom Layer w0.5: Q2.5 Q2.6 Q2.7 Q2.8 86.253,41.222 87.123,40.352 v1(89.577,40.352) 89.59,40.34 92.95,40.34 92.99,40.3 v1(94.5,40.3) ; v1(94.5,37.8) v1(94.5,40.3) ; D3.2@97.1,41.2 97.1,40.825 96.575,40.3 v1(94.5,40.3)
VCC: C1.2 C2.2 C3.2 C4.2 C6.2 C7.1 C14.2 J1.2 J2.2 J3.1 J7.1 J8.1 L1.2 MD1.5 MD1.6 MD1.7 R6.2 R16.1 R18.1 SW1.3 SW2.1 SW2.2 SW2.3 SW2.4 U1.1 | length 177.9
  Top Layer w0.2: J8.1 7.305,53.25 9.878,50.676 v1@10,50.676 ; 18.327,13.027 v1(19.127,13.027) 19.927,13.027 20.219,13.319 ; v1(22.027,14.427) 22.027,15.527 v1(26.027,19.527)
  Top Layer w0.5: 90.3,50.4 90.4,50.3 J2.2
  Top Layer w0.7: 8.527,35.227 7.999,35.227 4.963,32.192 4.963,30.863 5.903,29.923 8.431,29.923 9.027,29.327 ; 8.617,8.603 6.774,8.603 4.527,6.356 4.527,3.427 5.927,2.027 9.127,2.027 ; MD1.6@15.127,48.831 MD1.5 23.712,50.027 v1(24.761,51.076) ; v1(23.827,46.527) 23.773,46.527 23.073,47.227 MD1.7 MD1.6 24.419,48.627 24.661,48.87 v1(24.715,48.87) ; v1(51.727,28.527) ccw(c51.727,29.127) 52.327,29.127 ; v1(55.427,19.227) 55.527,19.227 55.827,19.527 ; 60.927,37.227 62.408,37.227 cw(c62.408,36.127) L1.2 ; v1@70.027,19.027 70.127,19.027 v1(70.227,18.927)
  Bottom Layer w0.2: v1(19.127,13.027) 20.627,13.027 v1(22.027,14.427) ; C1.2 41.352,20.052 42.627,18.777 v1(42.627,18.627)
  Bottom Layer w0.254: v1(12.727,10.127) 13.012,10.601 cw(c13.23,10.471) 13.049,10.649 14.801,12.424 R18.1
  Bottom Layer w0.3: v1(9.927,50.627) 10.727,49.827 v1(12.727,49.827) ; 13.125,49.325 14.402,48.048 14.456,48.048 15.302,47.202 C4.2 ; C3.2 13.177,49.377 v1(12.727,49.827) ; C2.2 15.302,51.552 14.779,51.029 14.704,51.029 13.502,49.827 v1(12.727,49.827)
  Bottom Layer w0.4: v1(26.027,19.527) 30.027,23.527 35.427,23.527 v1(39.427,27.527)
  Bottom Layer w0.5: v1(23.827,46.527) 28.054,46.527 28.654,47.127 32.827,47.127 v1(33.727,46.227) ; v1(24.715,48.87) 28.152,48.87 28.494,48.527 31.877,48.527 32.339,48.989 33.189,48.989 v1(33.227,49.027) ; v1(24.761,51.076) 27.53,51.076 28.779,49.827 32.327,49.827 32.681,50.181 32.681,50.327 33.227,50.873 v1(33.227,50.927)
  Bottom Layer w0.7: v1(10.327,21.827) 12.327,23.827 v1(12.527,23.827) ; U1.1 42.527,31.927 42.527,35.417 42.937,35.827 v1(43.227,35.827) ; v1(43.927,21.227) 43.927,21.617 44.337,22.027 47.077,22.027 49.625,24.576 49.625,26.425 v1(51.727,28.527) ; v1(44.029,40.8) 44.156,40.927 46.599,40.927 v1(46.626,40.954) ; v1(51.827,15.627) v1(55.427,19.227) ; v1(67.727,15.527) 67.727,16.427 v1(70.227,18.927)
Voltage_Measurement: D1.1 R3.2 R4.1 U1.19 | length 75.5
  Top Layer w0.254: U1.19 14.187,11.412 v1(17.98,15.205) ; v1(23.752,15.552) 23.927,15.377 v1(35.077,15.377)
  Bottom Layer w0.254: v1(17.98,15.205) 18.065,15.29 18.576,15.29 18.838,15.552 v1(23.752,15.552) ; v1(35.077,15.377) 48.002,15.377 66.752,34.127 D1.1 68.873,34.127 69.926,35.18 R3.2 70.329,35.18 71.109,35.96 71.109,37.65 70.329,38.43 R4.1
pads on no net: J1.5 J1.6 J2.3 J2.4 J4.3 J4.4 J5.A2 J5.A3 J5.A5 J5.A6 J5.A7 J5.A8 J5.A10 J5.A11 J5.B2 J5.B3 J5.B5 J5.B6 J5.B7 J5.B8 J5.B10 J5.B11 J5.S1 J5.S2 J5.S3 J5.S4 J7.3 J8.2 MD1.1 MD1.4 SW1.2 SW1.4 U1. U1.3 U1.12 U1.13 U1.17 U1.18 U1.27 U1.30 U2.8

## Polygon pours and split planes (outlines as drawn)
GND on Bottom Layer "NONET_L02_P000" (solid, shelved, pour order 0): 99.248,1.448 cw(c98.227,1.448) 98.227,0.427 37,0.427 8.73,0.427 8.327,55.926 40.727,55.926 cw(c42.028,55.927) 42.027,57.227 52.226,57.227 cw(c52.226,55.926) 53.527,55.926 78.927,55.926 ccw(c78.927,57.226) 80.227,57.226 80.227,58.587 cw(c82.767,58.587) 82.767,61.127 92.827,61.142 96.708,61.194 cw(c96.708,58.655) 99.248,58.654 99.248,5.727
VCC on Top Layer "NONET_L01_P002" (solid, shelved, pour order 2): 43.24,56.113 ccw(c43.24,53.573) 40.7,53.573 40.7,52.1 cw(c40.6,52.1) 40.6,52 39.4,52.013 10.43,52.013 ccw(c10.43,49.473) 7.89,49.467 7.89,3.627 7.927,2.978 ccw(c10.467,2.978) 10.467,0.438 92.244,0.438 ccw(c92.244,1.684) 93.49,1.684 93.49,56.273 ccw(c90.95,56.273) 90.95,58.813 84.09,58.813 ccw(c84.09,58.128) 83.406,58.128 83.406,57.646 cw(c81.873,57.646) 81.873,56.113

## Silkscreen, mask and mechanical layers (free items; w line width, h text height)
Top Overlay:
  drawing of 67 lines, arcs and shapes, not listed
  text "Part of:" at 83.453,65.203 h1.02
  text "Keep  / Out" at 7.627,60.127 h1.02
  text "Keep  / Out" at 30.627,60.127 h1.02
  text "Arkadiusz Rozmarynowicz / Ultra-Wideband Ranging Beacon / Warsaw University Of Technology / 28.02.2026" at 39,58 h1.02
  text "VCC" at 5.703,54.203 h1.02
  text "VCC=3.3V" at 56.953,54.203 h1.02
  text "VIN: / MIN around 3.7V / MAX 12V" at 69,50.75 h1.02
  text "B1" at 40.081,50.331 h1.02
  text "Reset" at 52.081,50.331 h1.02
  text "GND" at 94.5,49.8 h1.02 r270
  text "UNPROTECTED" at 98.047,47.953 h1.02 r90
  text "GND" at 5.703,47.453 h1.02
  text "3.3V" at 91.197,46.503 h1.02 r90
  text "DWM1000" at 17.931,40.431 h1.02
  text "VIN" at 90.93,28.431 h1.02
  text "CLK" at 64.331,28.081 h1.02
  text "DIO" at 64.431,26.431 h1.02
  text "VCC" at 54.731,24.931 h1.02